# Altium PCB PHOTODIODE_V1.3.0.PcbDoc (part 3 of 3)
Units mm, origin at the board's own origin, x right, y up, seen from the top; angles counter-clockwise.
Board outline 86 x 86 mm, 4 copper layers (L1_TOP, L2_GND, L3_SIGNAL, L4_BOT); 134 components, 78 nets, 520 pads, 1315 vias.
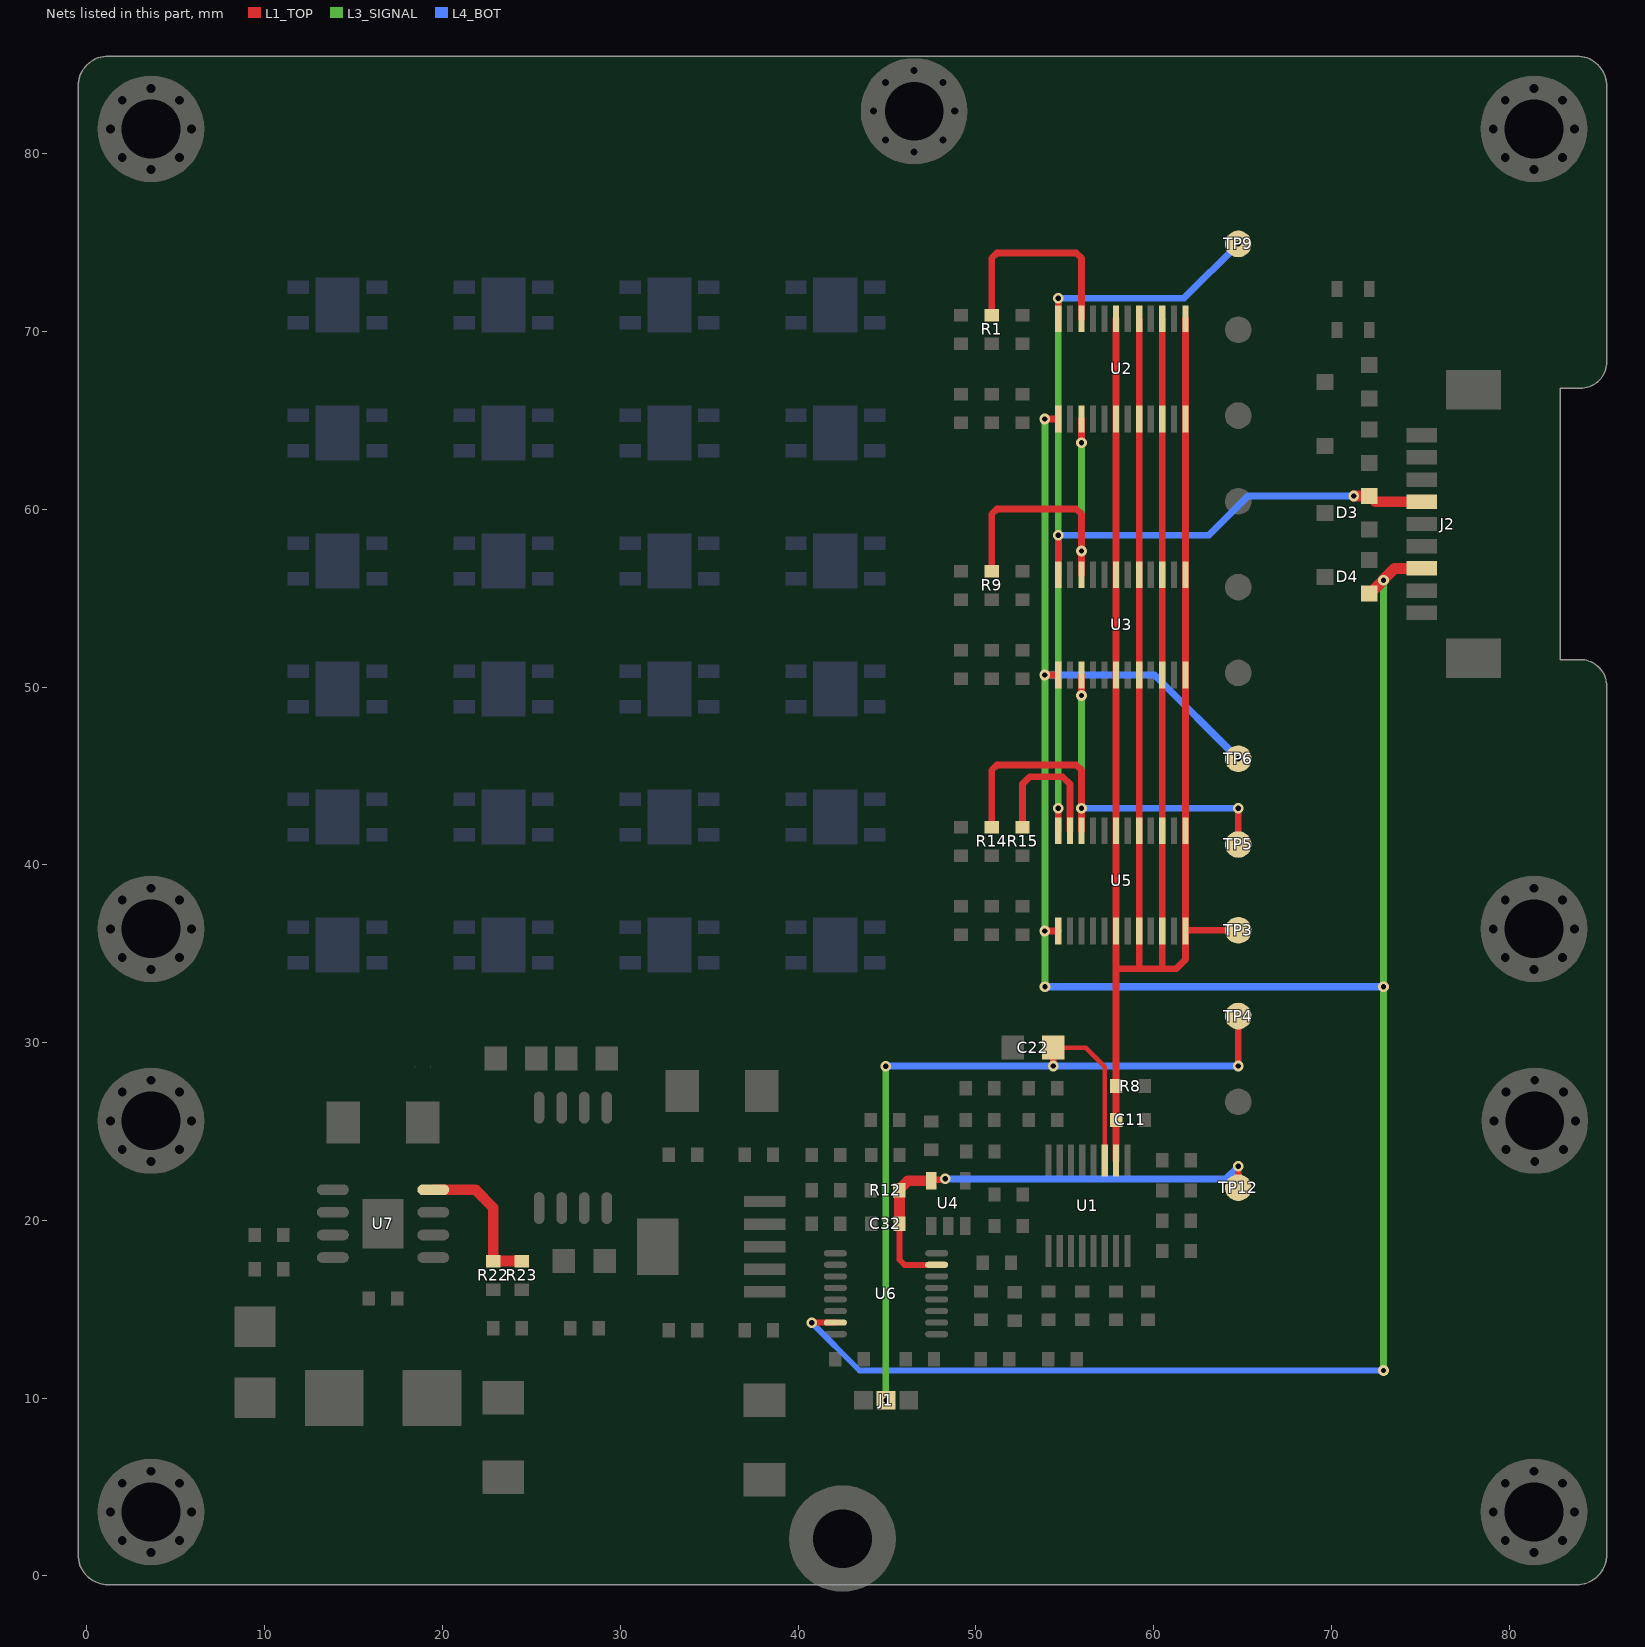
[diagram p5: the nets of this part, all layers, seen from the top]

## Via types
v1: diameter 0.6, hole 0.3, L1_TOP to L4_BOT, tented both sides, 1045 vias
v2: diameter 0.6, hole 0.3, L1_TOP to L4_BOT, 270 vias

## Nets (pads, with @x,y where several pads share a name; then routed paths per layer and width w, separated by ;. In a path a pad name is that pad's centre, name@x,y a point inside that pad or via, vN(x,y) a via of type N, cw(c..) or ccw(c..) an arc to the next point about the centre after c; other vN are vias at no path point) (continued)
NetR15_1: R15.1 U5.23 | length 8.1
  L1_TOP w0.381: R15.1@52.632,42.124 52.632,44.556 53.032,44.956 54.895,44.956 55.295,44.556 U5.23@55.295,41.919
NetR22_1: R22.1 R23.2 U7.4 | length 8.4
  L1_TOP w0.61: U7.4@19.482,21.721 21.853,21.721 22.86,20.714 R22.1@22.86,17.71 R23.2@24.46,17.71
PHOTODIODE: C11.1 R8.1 TP3.1 U1.2 U2.6 U2.8 U2.10 U2.12 U2.13 U2.15 U2.17 U2.19 U3.6 U3.8 U3.10 U3.12 U3.13 U3.15 U3.17 U3.19 U5.6 U5.8 U5.10 U5.12 U5.13 U5.15 U5.17 U5.19 | length 163.6
  L1_TOP w0.381: U1.2@57.895,23.381 C11.1@57.895,25.654 R8.1@57.895,27.559 57.895,34.163 ; U2.19@57.895,70.719 U2.6@57.895,65.081 U3.6@57.895,50.681 U5.6@57.895,36.281 57.895,34.163 ; U2.17@59.195,70.719 U2.8@59.195,65.081 U3.17@59.195,56.319 U3.8@59.195,50.681 U5.17@59.195,41.919 U5.8@59.195,36.281 59.195,34.163 ; U2.15@60.495,70.719 U2.10@60.495,65.081 U3.15@60.495,56.319 U3.10@60.495,50.681 U5.15@60.495,41.919 U5.10@60.495,36.281 60.495,34.163 ; U2.13@61.795,70.719 U2.12@61.795,65.081 U3.13@61.795,56.319 U3.12@61.795,50.681 U5.13@61.795,41.919 U5.12@61.795,36.281 ; TP3.1@64.77,36.322 61.804,36.322 61.795,36.312 U5.12@61.795,36.281 ; 57.895,34.163 59.195,34.163 ; 59.195,34.163 60.495,34.163 ; 60.495,34.163 61.283,34.163 61.795,34.675 U5.12@61.795,36.281
SCK_PD: D4.1 J2.3 TP6.1 U2.1 U3.1 U5.1 U6.15 | length 149.8
  L1_TOP w0.33: v1(40.767,14.246) 40.769,14.248 42.1,14.248 U6.15@42.102,14.25
  L1_TOP w0.4: v1(53.89,36.281) U5.1@54.645,36.281 ; v1(53.89,50.681) U3.1@54.645,50.681 ; v1(53.89,65.081) U2.1@54.645,65.081
  L1_TOP w0.61: v1(72.934,56.007) 72.169,55.242 72.169,55.26 72.912,56.004 72.912,56.029 73.559,56.675 J2.3@75.095,56.675
  L3_SIGNAL w0.381: v1(72.934,11.557) 72.934,33.164 v1(72.934,56.007)
  L3_SIGNAL w0.4: v1(53.89,65.081) v1(53.89,50.681) v1(53.89,36.281) 53.892,36.278 53.892,33.15 v1(53.895,33.147)
  L4_BOT w0.33: v1(40.767,14.246) 43.456,11.557 v1(72.934,11.557)
  L4_BOT w0.4: v1(53.89,50.681) 60.063,50.681 v1(64.77,45.974) ; v1(53.895,33.147) v1(72.934,33.147)
SDO_1: R14.1 TP5.1 U3.3 U5.22 | length 30.3
  L1_TOP w0.381: R14.1@50.898,42.124 50.898,45.33 51.19,45.622 55.653,45.622 55.945,45.33 v1(55.945,43.18) U5.22@55.945,41.919 ; v1(55.945,49.53) U3.3@55.945,50.681 ; TP5.1@64.77,41.148 v1(64.77,43.18)
  L3_SIGNAL w0.381: v1(55.945,43.18) v1(55.945,49.53)
  L4_BOT w0.381: v1(55.945,43.18) v1(64.77,43.18)
SDO_2: R9.1 U2.3 U3.22 | length 19.3
  L1_TOP w0.381: R9.1@50.898,56.524 50.898,59.73 51.19,60.022 55.653,60.022 55.945,59.73 v1(55.945,57.658) U3.22@55.945,56.319 ; v1(55.945,63.754) U2.3@55.945,65.081
  L3_SIGNAL w0.381: v1(55.945,57.658) v1(55.945,63.754)
SDO_3: R1.1 U2.22 | length 11.9
  L1_TOP w0.381: R1.1@50.898,70.924 50.898,74.13 51.19,74.422 55.653,74.422 55.945,74.13 U2.22@55.945,70.719
SW_CS: D3.3 J2.6 TP9.1 U2.24 U3.24 U5.24 | length 66.2
  L1_TOP w0.381: U5.24@54.645,41.919 v1(54.645,43.18) ; U3.24@54.645,56.319 v1(54.645,58.547) ; U2.24@54.645,70.719 v1(54.645,71.882)
  L1_TOP w0.61: v1(71.263,60.754) D3.3@72.138,60.754 ; D3.3@72.163,60.754 72.492,60.425 J2.6@75.095,60.425
  L3_SIGNAL w0.381: v1(54.645,43.18) v1(54.645,58.547) v1(54.645,71.882)
  L4_BOT w0.381: v1(54.645,58.547) 63.119,58.547 65.326,60.754 v1(71.263,60.754) ; v1(54.645,71.882) 61.722,71.882 v1(64.77,74.93)
VREF_ADC: C32.2 R12.1 TP12.1 U4.5 U6.7 | length 27
  L1_TOP w0.33: C32.2@45.706,19.817 45.706,17.785 45.991,17.5 U6.7@47.802,17.5
  L1_TOP w0.381: U4.5@47.502,22.23 47.562,22.291 48.233,22.291 v1(48.277,22.334) ; TP12.1@64.77,21.844 v1(64.77,23.044)
  L1_TOP w0.61: C32.2@45.706,19.817 45.706,21.695 R12.1@45.702,21.699 45.702,21.749 46.182,22.23 U4.5@47.502,22.23
  L4_BOT w0.381: v1(48.277,22.334) 64.06,22.334 v1(64.77,23.044)
VREF_PD: C22.1 J1.2 TP4.1 U1.3 | length 51.1
  L1_TOP w0.254: C22.1@54.356,29.718 56.19,29.718 57.26,28.648 U1.3@57.26,23.381
  L1_TOP w0.381: v1(54.356,28.689) C22.1@54.356,29.718 ; v1(64.77,28.689) TP4.1@64.77,31.496
  L3_SIGNAL w0.381: v1(44.931,28.681) 44.931,9.908 v1(44.952,9.887)
  L4_BOT w0.381: v1(44.931,28.681) 44.935,28.685 54.352,28.685 v1(54.356,28.689) v1(64.77,28.689)
pads on no net: J2.10 J2.11 PD1.3 PD2.3 PD3.3 PD4.3 PD5.3 PD6.3 PD7.3 PD8.3 PD9.3 PD10.3 PD11.3 PD12.3 PD13.3 PD14.3 PD15.3 PD16.3 PD17.3 PD18.3 PD19.3 PD20.3 PD21.3 PD22.3 PD23.3 PD24.3 U1.5 U1.6 U1.7 U1.8 U1.9 U4.1 U6.2 U6.8 U7.2 U7.3 U7.5 U9.1 U9.7

## Polygon pours and split planes (outlines as drawn)
GND on L1_TOP "NONET_L01_P-001" (solid, pour order 56): 78.1,80.929 78.1,84.353 84.353,84.353 84.353,78.1 80.929,78.1 cw(c80.929,80.929)
GND on L1_TOP "NONET_L-01_P-001" (solid, pour order 54): -0.5,1.2 -0.5,83.8 -0.5,83.806 cw(c1.2,83.8) 1.2,85.5 83.8,85.5 83.806,85.5 cw(c83.8,83.8) 85.5,83.8 85.5,68.306 85.5,68.301 cw(c84,68.306) 84,66.806 82.886,66.806 82.886,51.55 84,51.55 cw(c84,50.05) 85.5,50.05 85.5,1.2 85.5,1.196 cw(c83.8,1.2) 83.8,-0.5 1.2,-0.5 1.194,-0.5 cw(c1.2,1.2)
GND on L1_TOP "NONET_L01_P-001" (solid, pour order 9): 78.1,4.071 78.1,0.647 84.353,0.647 84.353,6.9 80.929,6.9 ccw(c80.929,4.071)
GND on L1_TOP "NONET_L01_P-001" (solid, pour order 12): 6.9,4.071 6.9,0.647 0.647,0.647 0.647,6.9 4.071,6.9 cw(c4.071,4.071)
GND on L1_TOP "NONET_L01_P-001" (solid, pour order 11): 6.9,80.929 6.9,84.353 0.647,84.353 0.647,78.1 4.071,78.1 ccw(c4.071,80.929)
12V_EXP on L1_TOP "12V_EXP_L01_P052" (solid, pour order 52): 73.66,30.226 73.914,29.972 75.692,29.972 75.946,30.226 75.946,54.356 75.692,54.61 73.914,54.61 73.66,54.356
+5 on L1_TOP "+5_L01_P051" (solid, pour order 51): 19.05,29.464 23.622,29.464 23.876,29.21 23.876,27.94 23.622,27.686 19.05,27.686
12V_EXP on L1_TOP "Top Layer-12V_EXP" (solid, pour order 40): 13.208,24.384 13.462,24.13 16.256,24.13 16.51,24.384 16.51,27.686 18.745,27.686 18.745,29.464 16.51,29.464 16.51,32.258 16.256,32.512 13.462,32.512 13.208,32.258 13.208,29.21 13.208,27.94
+5 on L1_TOP "+5_L01_P039" (solid, pour order 39): 39.878,8.382 39.624,8.128 17.78,8.128 17.526,8.382 17.526,11.684 17.78,11.938 39.624,11.938 39.878,11.684
NetC33_1 on L1_TOP "NETC33_1_L01_P038" (solid, pour order 38): 8.128,8.128 7.874,8.382 7.874,11.684 8.128,11.938 12.446,11.938 12.7,12.192 12.7,17.907 12.954,18.161 14.986,18.161 16.256,16.891 16.256,8.382 16.002,8.128
GND on L4_BOT "GND_L04_P055" (solid, pour order 55): -0.5,1.2 -0.5,83.8 -0.5,83.806 cw(c1.2,83.8) 1.2,85.5 83.8,85.5 83.806,85.5 cw(c83.8,83.8) 85.5,83.8 85.5,68.306 85.5,68.301 cw(c84,68.306) 84,66.806 82.886,66.806 82.886,51.55 84,51.55 cw(c84,50.05) 85.5,50.05 85.5,1.2 85.5,1.196 cw(c83.8,1.2) 83.8,-0.5 1.2,-0.5 1.194,-0.5 cw(c1.2,1.2)
GND on L4_BOT "GND_L04_P042" (solid, pour order 42): 10.16,73.66 10.16,33.528 45.72,33.528 45.72,73.66
GND on L4_BOT "NONET_L01_P-001" (solid, pour order 31): 80.929,78.1 84.353,78.1 84.353,84.353 78.1,84.353 78.1,80.929 ccw(c80.929,80.929)
GND on L4_BOT "NONET_L01_P-001" (solid, pour order 30): 78.1,4.071 78.1,0.647 84.353,0.647 84.353,6.9 80.929,6.9 ccw(c80.929,4.071)
GND on L4_BOT "NONET_L01_P-001" (solid, pour order 29): 6.9,4.071 6.9,0.647 0.647,0.647 0.647,6.9 4.071,6.9 cw(c4.071,4.071)
GND on L4_BOT "NONET_L01_P-001" (solid, pour order 17): 6.9,80.929 6.9,84.353 0.647,84.353 0.647,78.1 4.071,78.1 ccw(c4.071,80.929)
12V_EXP on L4_BOT "12V_EXP_L04_P037" (solid, pour order 37): 75.946,30.226 75.692,29.972 13.462,29.972 13.208,30.226 13.208,32.258 13.462,32.512 75.692,32.512 75.946,32.258
GND on L3_SIGNAL "GND_L03_P036" (solid, pour order 36): -0.5,1.2 -0.5,83.8 -0.5,83.806 cw(c1.2,83.8) 1.2,85.5 83.8,85.5 83.806,85.5 cw(c83.8,83.8) 85.5,83.8 85.5,68.306 85.5,68.301 cw(c84,68.306) 84,66.806 82.886,66.806 82.886,51.55 84,51.55 cw(c84,50.05) 85.5,50.05 85.5,1.2 85.5,1.196 cw(c83.8,1.2) 83.8,-0.5 1.2,-0.5 1.194,-0.5 cw(c1.2,1.2)
GND on L3_SIGNAL "NONET_L01_P-001" (solid, pour order 19): 6.9,4.071 6.9,0.647 0.647,0.647 0.647,6.9 4.071,6.9 cw(c4.071,4.071)
GND on L3_SIGNAL "NONET_L01_P-001" (solid, pour order 18): 78.1,4.071 78.1,0.647 84.353,0.647 84.353,6.9 80.929,6.9 ccw(c80.929,4.071)
GND on L3_SIGNAL "NONET_L01_P-001" (solid, pour order 7): 78.1,80.929 78.1,84.353 84.353,84.353 84.353,78.1 80.929,78.1 cw(c80.929,80.929)
GND on L3_SIGNAL "NONET_L01_P-001" (solid, pour order 3): 6.9,80.929 6.9,84.353 0.647,84.353 0.647,78.1 4.071,78.1 ccw(c4.071,80.929)
GND on L2_GND "NONET_L-01_P-001" (solid, pour order 35): -0.5,1.2 -0.5,83.8 -0.5,83.806 cw(c1.2,83.8) 1.2,85.5 83.8,85.5 83.806,85.5 cw(c83.8,83.8) 85.5,83.8 85.5,68.306 85.5,68.301 cw(c84,68.306) 84,66.806 82.886,66.806 82.886,51.55 84,51.55 cw(c84,50.05) 85.5,50.05 85.5,1.2 85.5,1.196 cw(c83.8,1.2) 83.8,-0.5 1.2,-0.5 1.194,-0.5 cw(c1.2,1.2)
GND on L2_GND "NONET_L01_P-001" (solid, pour order 2): 78.1,80.929 78.1,84.353 84.353,84.353 84.353,78.1 80.929,78.1 cw(c80.929,80.929)
GND on L2_GND "NONET_L01_P-001" (solid, pour order 6): 6.9,80.929 6.9,84.353 0.647,84.353 0.647,78.1 4.071,78.1 ccw(c4.071,80.929)
GND on L2_GND "NONET_L01_P-001" (solid, pour order 4): 6.9,4.071 6.9,0.647 0.647,0.647 0.647,6.9 4.071,6.9 cw(c4.071,4.071)
GND on L2_GND "NONET_L01_P-001" (solid, pour order 0): 78.1,4.071 78.1,0.647 84.353,0.647 84.353,6.9 80.929,6.9 ccw(c80.929,4.071)

## Keep-outs
L1_TOP:
  lines w0.2: 9.906,33.274 45.974,33.274 45.974,73.914 9.906,73.914 9.906,33.274 ; 10.16,33.528 45.72,33.528 45.72,73.66 10.16,73.66 10.16,33.528
L2_GND:
  lines w0.2: 9.906,33.274 9.906,73.914 45.974,73.914 45.974,33.274 9.906,33.274 ; 10.16,33.528 10.16,73.66 45.72,73.66 45.72,33.528 10.16,33.528
L3_SIGNAL:
  lines w0.2: 9.906,33.274 9.906,73.914 45.974,73.914 45.974,33.274 9.906,33.274 ; 10.16,33.528 10.16,73.66 45.72,73.66 45.72,33.528 10.16,33.528
L4_BOT:
  lines w0.2: 9.906,33.274 45.974,33.274 45.974,73.914 9.906,73.914 9.906,33.274 ; 10.16,33.528 45.72,33.528 45.72,73.66 10.16,73.66 10.16,33.528
Keep-Out Layer:
  lines w0.254: -0.5,83.8 -0.5,1.2 ccw(c1.2,1.2) 1.194,-0.5 ; -0.5,83.806 cw(c1.2,83.8) 1.2,85.5 83.8,85.5 ; 1.2,-0.5 83.8,-0.5 ccw(c83.8,1.2) 85.5,1.196 ; 83.806,85.5 cw(c83.8,83.8) 85.5,83.8 85.5,68.306 ; 85.5,1.2 85.5,50.05 ccw(c84,50.05) 84,51.55 82.886,51.55 82.886,66.806 84,66.806 ccw(c84,68.306) 85.5,68.301

## Other copper
L1_TOP:
  rectangle net GND: 10.414,33.782 45.466,73.406
L2_GND:
  rectangle net GND: 10.414,33.782 45.466,73.406
L3_SIGNAL:
  rectangle net GND: 10.414,33.782 45.466,73.406

## Silkscreen, mask and mechanical layers (free items; w line width, h text height)
Top Overlay:
  drawing of 299 lines, arcs and shapes, not listed
  text "SW_CS" at 63.424,76.738 h1.2
  text "ADC_IN" at 63.3,72.024 h1.2
  text "ADC_CONV" at 62.526,67.324 h1.2
  text "ADC_CS" at 63.215,62.416 h1.2
  text "MISO" at 63.861,57.459 h1.2
  text "MOSI" at 63.758,52.587 h1.2
  text "SCK" at 64.056,47.901 h1.2
  text "SDO1" at 63.712,43.189 h1.2
  text "I_PHOTO" at 63.108,38.275 h1.2
  text "VREF_PD" at 62.988,33.576 h1.2
  text "+" at 54.737,32.044 h1 r180
  text "+" at 27.305,31.409 h1 r180
  text "+" at 38.608,30.901 h1 r180
  text "+" at 21.844,29.504 h1 r180
  text "TIA_OUT" at 63.02,28.607 h1.2
  text "+" at 11.43,24.979 h1
  text "VREF_ADC" at 62.701,23.988 h1.2
  text "PHOTODIODE V1.3.0" at 57.9,10.306 h2
  text "+" at 26.416,9.739 h1
  text "+" at 34.29,9.739 h1
  text "DESIGNED BY KHOA DUONG" at 59.761,8.582 h1.2
  text "CHECKED BY BAO BUI" at 61.829,7.228 h1.2
  text "GND    0.5V" at 41.316,6.624 h1.52
  text "APPROVED BY VU PHAM" at 61.22,5.873 h1.2
Bottom Overlay:
  drawing of 342 lines, arcs and shapes, not listed
Top Solder:
  rectangle: 83.337,1.117 83.845,1.6
  rectangle: 0.722,1.277 1.858,1.761
  rectangle: 1.2,83.32 1.708,83.803
  rectangle: 83.359,83.359 83.867,83.842
Bottom Solder:
  rectangle: 83.337,1.117 83.845,1.6
  rectangle: 0.722,1.277 1.858,1.761
  rectangle: 1.2,83.32 1.708,83.803
  rectangle: 83.359,83.359 83.867,83.842